# Altium PCB PCB.PcbDoc
Units mil, origin at the board's own origin, x right, y up, seen from the top; angles counter-clockwise.
Board outline 3776.62 x 3776.62 mil, 2 copper layers (Top Layer, Bottom Layer); 52 components, 61 nets, 206 pads, 78 vias.
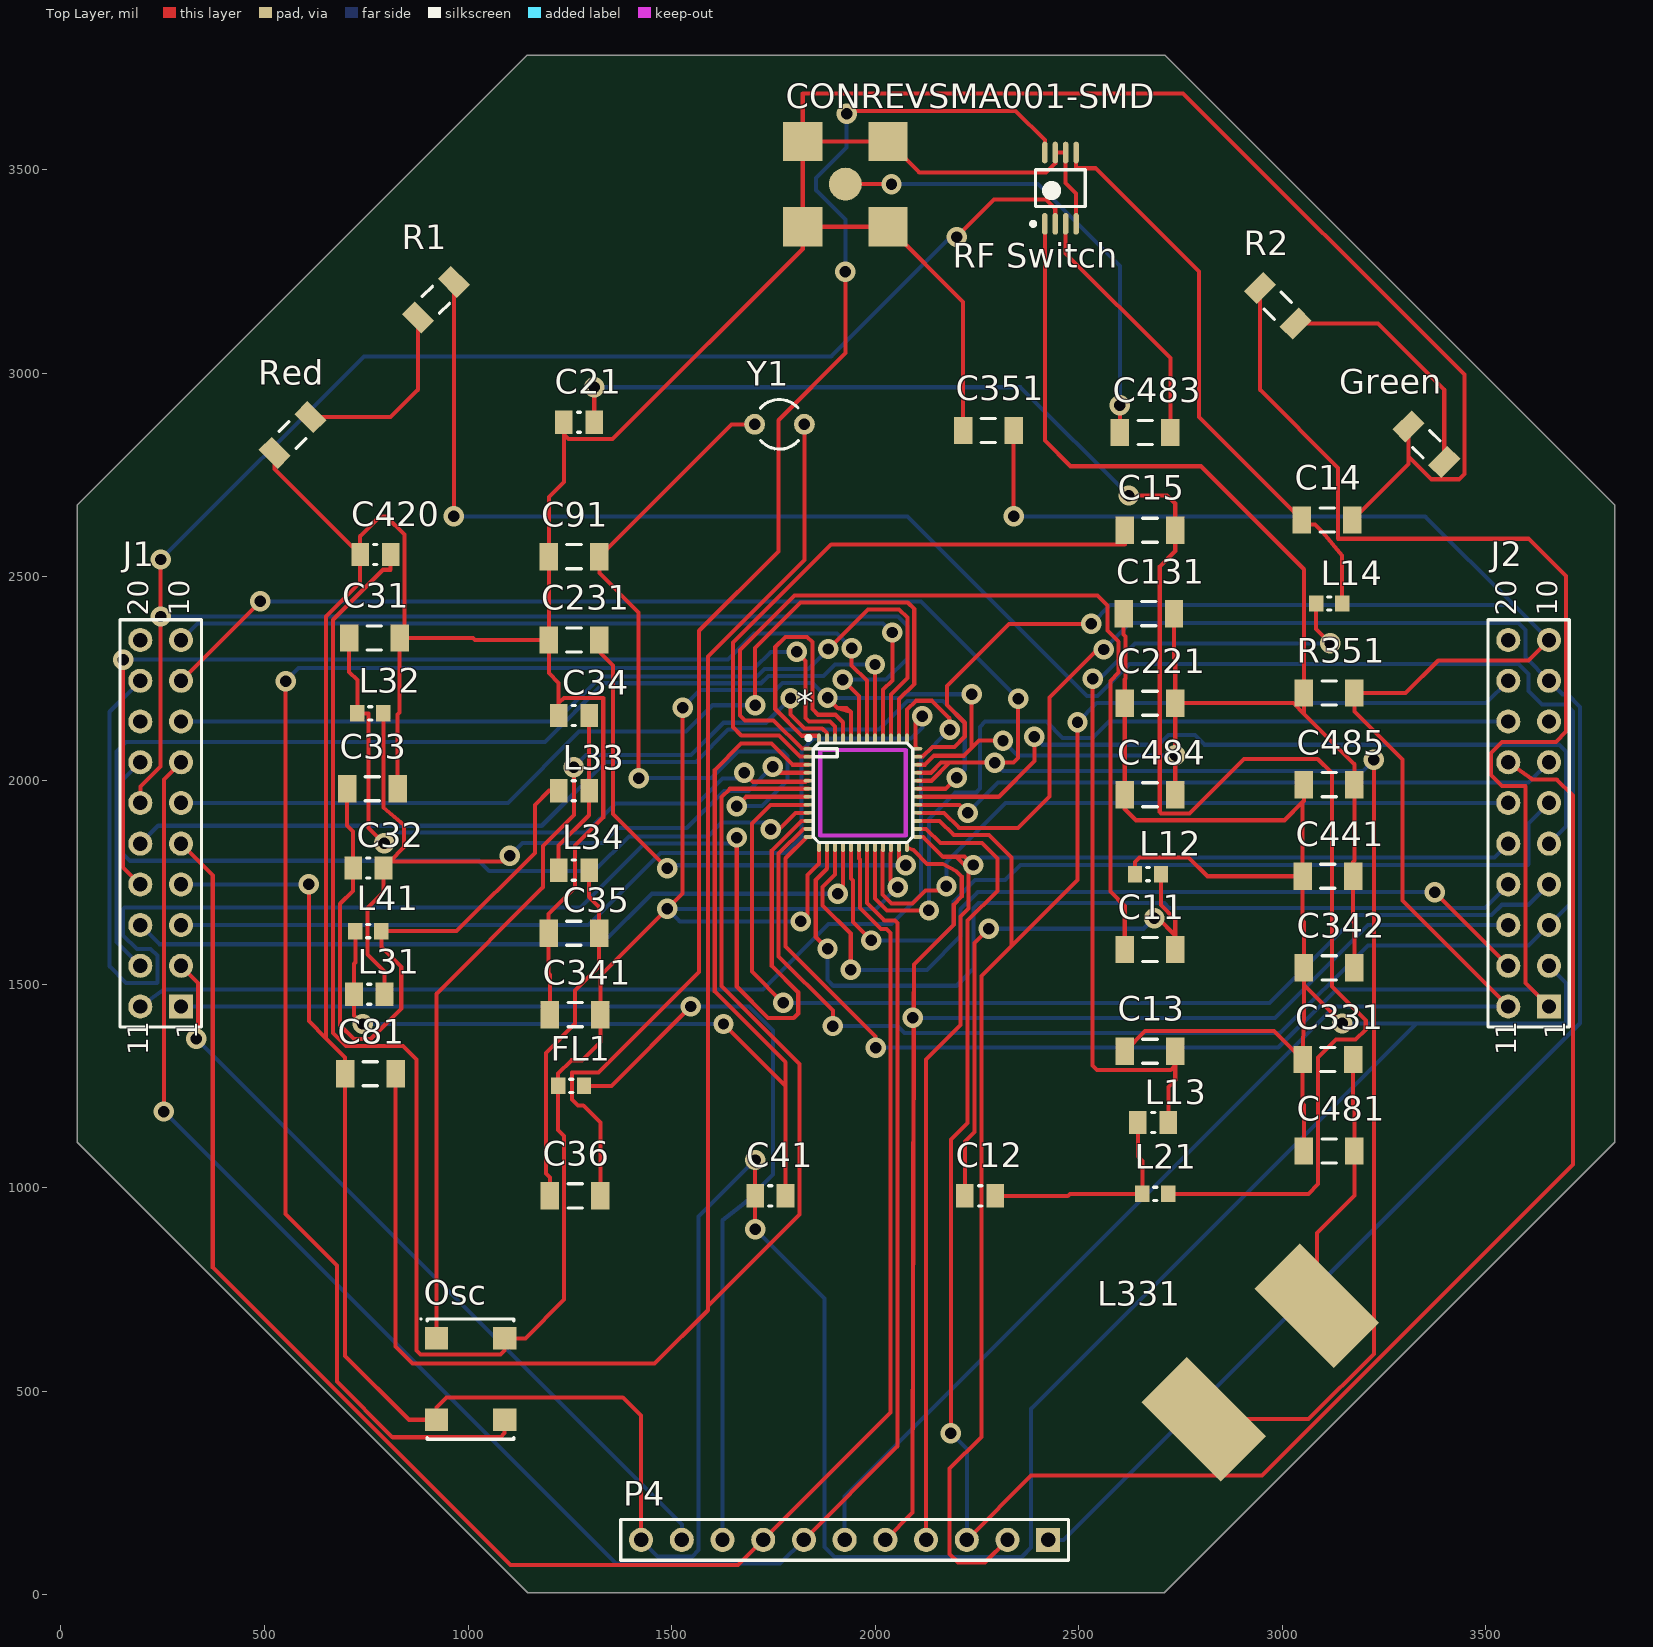
[diagram p0: Top Layer view]
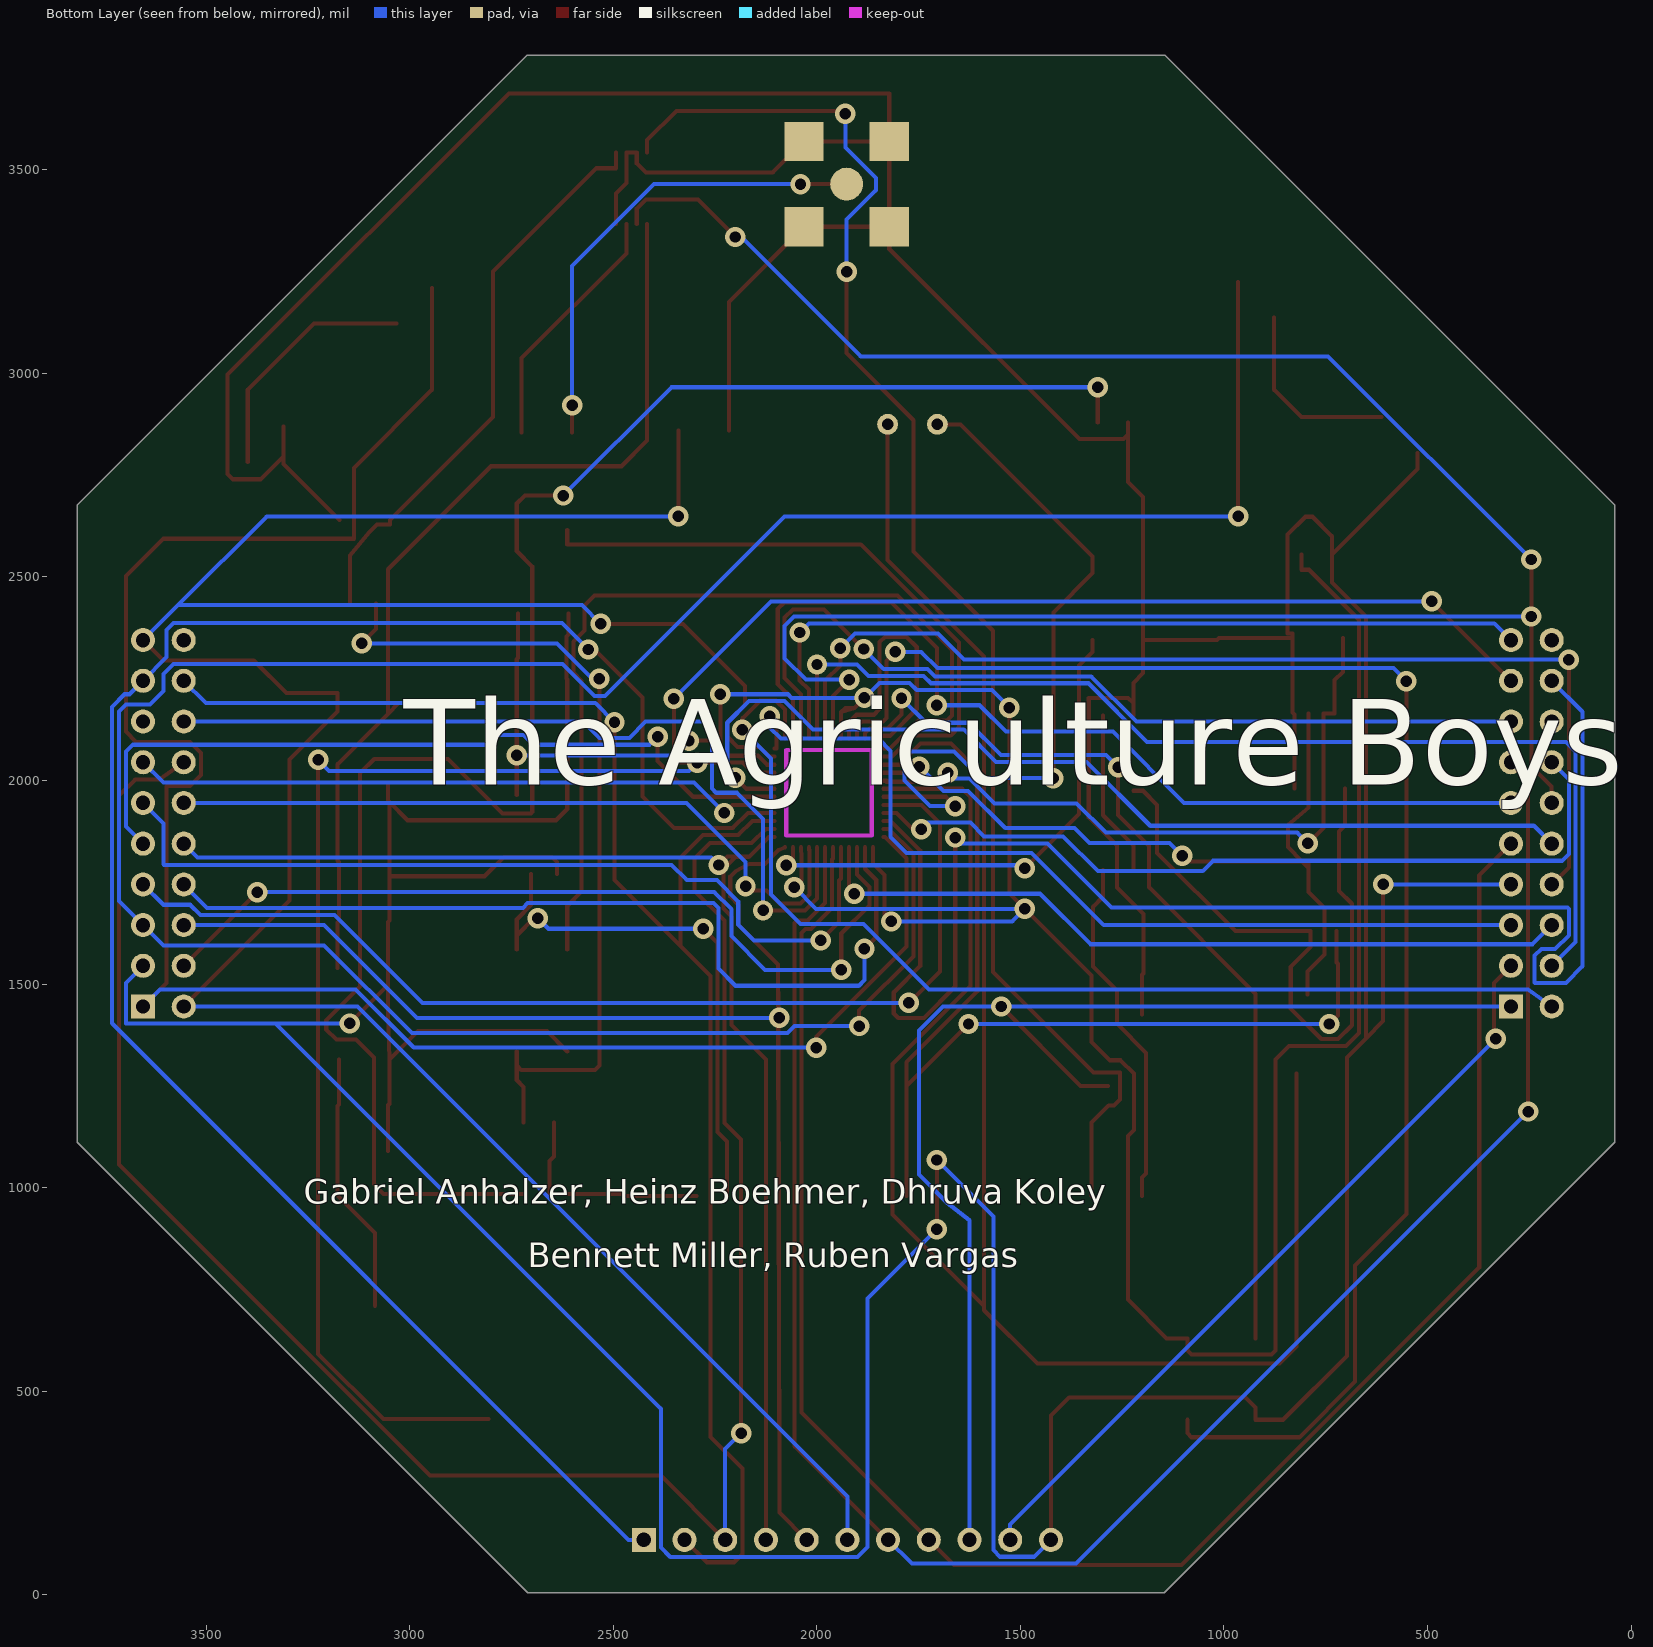
[diagram p1: Bottom Layer view, seen from below]

## Layer stack, top to bottom
Top Solder: solder mask 0.4, Solder Resist, Dk 3.5
Top Layer: signal copper 1.4
Dielectric 1: dielectric 12.6, FR-4, Dk 4.8
Bottom Layer: signal copper 1.4
Bottom Solder: solder mask 0.4, Solder Resist, Dk 3.5

## Board outline
40,1111.62 40,2676.62 1145,3781.62 2711.62,3781.62 3816.62,2676.62 3816.62,1111.62 2710,5 1146.62,5

## Design rules (kind name [scope] priority, off if disabled: settings)
Clearance [All] p1: gap=7 ignorepadtopadclearanceinfootprint=TRUE
PolygonConnect [All] p1: connectstyle=Relief reliefconductorwidth=10 reliefentries=4 polygonreliefangle="90 Angle" airgapwidth=10
RoutingVias [All] p1: holewidth=28 width=50 viastyle="Through Hole" minholewidth=28 minwidth=50 maxholewidth=28 maxwidth=50
SolderMaskExpansion [All] p1: expansion=4
Width [All] p1: maxlimit=10 minlimit=10 preferedwidth=10
30 further rules are at their usual default settings.

## Classes and differential pairs
component class Sheet2: Green J1 J2 P4 R1 R2 Red
component class Sheet1: * C11 C12 C13 C14 C15 C21 C31 C32 C33 C34 C35 C36 C41 C81 C91 C131 C221 C231 C331 C341 C342 C351 C420 C441 C481 C483 C484 C485 CONREVSMA001-SMD FL1 L12 L13 L14 L21 L31 L32 L33 L34 L41 L331 Osc R351 "RF Switch" Y1

## Components (designator, comment, footprint, x,y, rotation, side; value= is the part's Value field where it differs from the comment)
* "CC1352R1F3RGZ_1" CC1352R 1970,1970 r0 top
C11 "Cap" "1206 Real" 2675,1585 r0 top value=12pF
C12 "Cap" "0805 Real" 2257.6,980 r0 top value=1.1pF
C13 "Cap" "1206 Real" 2675,1335 r0 top value=1pF
C14 "Cap" "1206 Real" 3110,2640 r180 top value=1pF
C15 "Cap" "1206 Real" 2675,2615 r0 top value=12pF
C21 "Cap" "0805 Real" 1272.6,2880 r0 top value=1.1pF
C31 "Cap" "1206 Real" 770,2350 r0 top value=100pF
C32 "Cap" "0805 Real" 755,1785 r180 top value=3.6pF
C33 "Cap" "1206 Real" 765,1980 r180 top value=2.7pF
C34 "Cap" "0805 Real" 1260,2160 r0 top value=6.2pF
C35 "Cap" "1206 Real" 1260,1625 r0 top value=3pF
C36 "Cap" "1206 Real" 1262.99,980 r0 top value=100pF
C41 "Cap" "0805 Real" 1742.4,980 r0 top value=3.6pF
C81 "Cap" "1206 Real" 760,1280 r180 top value=12pF
C91 "Cap" "1206 Real" 1260.35,2550 r180 top value=12pF
C131 "Cap" "1206 Real" 2672.01,2410 r180 top value=0.1uF
C221 "Cap" "1206 Real" 2675,2190 r180 top value=0.1uF
C231 "Cap" "1206 Real" 1260.35,2345 r180 top value=1uF
C331 "Cap" "1206 Real" 3112.01,1315 r180 top value=22uF
C341 "Cap" "1206 Real" 1262.99,1425 r180 top value=22uF
C342 "Cap" "1206 Real" 3115,1540 r180 top value=0.1uF
C351 "Cap" "1206 Real" 2277.99,2860 r180 top value=0.1uF
C420 "Cap" "0805 Real" 772.4,2555 r180 top value=0.01uF
C441 "Cap" "1206 Real" 3112.01,1765 r180 top value=0.1uF
C481 "Cap" "1206 Real" 3115,1090 r180 top value=0.1uF
C483 "Cap" "1206 Real" 2662.99,2855 r180 top value=12pF
C484 "Cap" "1206 Real" 2675,1965 r180 top value=12pF
C485 "Cap" "1206 Real" 3115,1990 r180 top value=12pF
CONREVSMA001-SMD "" SMA_Jack 1926.81,3465 r90 top
FL1 "BLM" 0603 1253.11,1250 r180 top value=2.4nH
Green "LED0" "1206 Real" 3353.85,2826.15 r135 top
J1 "SSQ-110-23-L-D" HDR2X10_CEN 295,1445 r90 top
J2 "SSQ-110-23-L-D" HDR2X10_CEN 3655,1445 r90 top
L12 "Inductor" 0603 2670,1770 r180 top value=2.4nH
L13 "Inductor" "0805 Real" 2682.6,1160 r0 top value=1.5nH
L14 "Inductor" 0603 3115,2435 r0 top value=2nH
L21 "Inductor" 0603 2688.11,985 r180 top value=2.4nH
L31 "Inductor" "0805 Real" 757.32,1475 r180 top value=27nH
L32 "Inductor" 0603 760,2165 r180 top value=7.5nH
L33 "Inductor" "0805 Real" 1260,1975 r0 top value=6.8nH
L34 "Inductor" "0805 Real" 1260,1780 r0 top value=6.8nH
L41 "Inductor" 0603 755,1630 r0 top value=7.5nH
L331 "Inductor" "Non-Standard Inductor" 2945.81,570.81 r45 top value=6.8mH
Osc "Osc" OSC 1006.14,530 r0 top
P4 "BB02-HJ221-KB1-603000" HDR1X11 2425,135 r180 top
R1 "Res1" "1206 Real" 921.15,3181.15 r45 top value=180
R2 "Res3" "1206 Real" 2988.85,3166.15 r135 top value=220
R351 "Res3" "1206 Real" 3115,2215 r180 top value=100K
Red "LED0" "1206 Real" 568.85,2848.85 r225 top
"RF Switch" "PE4250" "RF Switch" 2455,3455 r90 top
Y1 "32.768kHz" R38 1765,2875 r270 top

## Footprints (in the part's own frame and the unit in brackets; to place one, negate y for a bottom-side part, rotate by r counter-clockwise, add the part's x,y. Pads: shape width x height; smd on the part's side, far side on the other; paste and mask are expansions set on the pad)
0603 [mm]
  rect 0.89x1.02 smd: 1(-0.81,0) 2(0.81,0)
  silkscreen extent -0.1,-0.41 0.1,0.41, body extent -0.9,-0.5 0.9,0.5, height 0.4
"0805 Real" [mm]
  rect 1.1x1.45 smd: 1(-0.95,0) 2(0.95,0)
  silkscreen extent -0.1,-0.62 0.1,0.62, body extent -1.15,-0.72 1.15,0.72, height 1.15
"1206 Real" [mm] "Chip Capacitor, 2-Leads, Body 3.05x1.55mm, IPC Medium Density"
  rect 1.15x1.7 smd: 1(-1.575,0) 2(1.575,0)
  silkscreen extent -0.45,-0.75 0.45,0.75, body extent -1.6,-0.85 1.6,0.85, height 0.65
CC1352R [mm] "CQFP, 48-Leads, Body 7,40x7,40mm, Pitch 0,50mm, IPC Medium Density"
  oval 0.6x0.24 smd: 1(-3.4,2.75) 2(-3.4,2.25) 3(-3.4,1.75) 4(-3.4,1.25) 5(-3.4,0.75) 6(-3.4,0.25) 7(-3.4,-0.25) 8(-3.4,-0.75) 9(-3.4,-1.25) 10(-3.4,-1.75) 11(-3.4,-2.25) 12(-3.4,-2.75) 25(3.4,-2.75) 26(3.4,-2.25) 27(3.4,-1.75) 28(3.4,-1.25) 29(3.4,-0.75) 30(3.4,-0.25) 31(3.4,0.25) 32(3.4,0.75) 33(3.4,1.25) 34(3.4,1.75) 35(3.4,2.25) 36(3.4,2.75)
  oval 0.24x0.6 smd: 13(-2.75,-3.4) 14(-2.25,-3.4) 15(-1.75,-3.4) 16(-1.25,-3.4) 17(-0.75,-3.4) 18(-0.25,-3.4) 19(0.25,-3.4) 20(0.75,-3.4) 21(1.25,-3.4) 22(1.75,-3.4) 23(2.25,-3.4) 24(2.75,-3.4) 37(2.75,3.4) 38(2.25,3.4) 39(1.75,3.4) 40(1.25,3.4) 41(0.75,3.4) 42(0.25,3.4) 43(-0.25,3.4) 44(-0.75,3.4) 45(-1.25,3.4) 46(-1.75,3.4) 47(-2.25,3.4) 48(-2.75,3.4)
  silkscreen extent -3.52,-3.1 3.1,3.54, body extent -3.5,-3.5 6.98,3.5, height 1
HDR1X11 [mm] "Connector; Header; 11 Position"
  rect 1.5x1.5 hole 0.9: 1(0,0)
  round 1.5 hole 0.9: 2(2.54,0) 3(5.08,0) 4(7.62,0) 5(10.16,0) 6(12.7,0) 7(15.24,0) 8(17.78,0) 9(20.32,0) 10(22.86,0) 11(25.4,0)
  silkscreen extent -1.27,-1.27 26.67,1.27
HDR2X10_CEN [mm] "Connector; Header; 10x2 Position"
  rect 1.5x1.5 hole 0.9: 1(0,0)
  round 1.5 hole 0.9: 2(2.54,0) 3(5.08,0) 4(7.62,0) 5(10.16,0) 6(12.7,0) 7(15.24,0) 8(17.78,0) 9(20.32,0) 10(22.86,0) 11(0,2.54) 12(2.54,2.54) 13(5.08,2.54) 14(7.62,2.54) 15(10.16,2.54) 16(12.7,2.54) 17(15.24,2.54) 18(17.78,2.54) 19(20.32,2.54) 20(22.86,2.54)
  silkscreen extent -1.27,-1.27 24.13,3.81
"Non-Standard Inductor" [mm] "Chip Inductor, Body 1.0x0.5mm, IPC High Density"
  rect 4x7 smd: 1(-5,0) 2(5,0)
OSC [mm] "SON, 4-Leads, Body 7,00x5,08mm, Pitch 5,08mm, IPC Medium Density"
  rect 1.45x1.4 smd: 1O(-2.13,2.54) 2O(-2.13,-2.54) 3O(2.13,-2.54) 4O(2.13,2.54)
  silkscreen extent -3.15,-3.75 2.7,3.8, body extent -2.54,-2.54 2.54,2.54, height 1.27
R38 [mm] "Crystal, Thru-Hole; 2 Leads; Body 3.1 x 8.2 mm (Dia.xH)"
  round 1.3 hole 0.7: 1(0,1.55) 2(0,-1.55)
  silkscreen extent -1.55,-1.19 1.55,1.17
"RF Switch" [mm] "TSOP, 8-Leads, Body 3.00x3.00mm, Pitch 0.65mm, IPC Medium Density"
  oval 1.35x0.35 smd: 1P(-2.225,0.975) 2P(-2.225,0.325) 3P(-2.225,-0.325) 4P(-2.225,-0.975) 5P(2.225,-0.975) 6P(2.225,-0.325) 7P(2.225,0.325) 8P(2.225,0.975)
  silkscreen extent -2.35,-1.55 1.15,1.82, body extent -1.55,-1.55 1.55,1.55, height 0.92
SMA_Jack [mm] "Connector; RF Coaxial, MMCX, Thru-Hole; 5 Position; Vertical"
  round 2.05 all layers, no hole: 1(0,0)
  rect 2.44x2.44 all layers, no hole: 2(-2.66,2.66) 3(-2.66,-2.66) 4(2.66,2.66) 5(2.66,-2.66)

## Part data
C11 C12 C13 C14 C15 C21 C31 C32 C33 C34 C35 C36 C41 C81 C91 C131 C221 C231 C331 C341 C342 C351 C420 C441 C481 C483 C484 C485: "Capacitor", LatestRevisionDate=17-Jul-2002, LatestRevisionNote="Re-released for DXP Platform.", PackageDescription="Radial Cap, Thru-Hole; 2 Leads; 0.3 in Pin Spacing", PackageReference=RAD-0.3, Published=8-Jun-2000, Publisher="Altium Limited"
CONREVSMA001-SMD: library part COAX-M, "RF Coaxial PCB Connector, MMCX; Thru-Hole, Vertical Mount Plug,  50 Ohm Impedance", PackageDocument="Rev. A, 16-Jun-1997", ComponentLink1Description="Manufacturer Link", ComponentLink1URL=http://www.amphenolrf.com/, DatasheetDocument=30-May-2003, DrillSize="Corresponds to nominal value.", LatestRevisionDate=15-Jul-2004, LatestRevisionNote="Component Replaced.", PackageReference=908-21103, PCB_Layout="Complies with manufacturer's recommendation.", Published=15-Jul-2004, Publisher="Altium Limited"
FL1: library part Inductor, "Inductor", Code_IEC=1005, Code_JEITA=0402, LatestRevisionDate=29-May-2009, LatestRevisionNote="IPC-7351 Footprint Added.", PackageDescription="Chip Inductor", PackageReference=0402-A, Published=8-Jun-2000, Publisher="Altium Limited"
Green Red: "Typical INFRARED GaAs LED", LatestRevisionDate=08-Jul-2005, LatestRevisionNote="Mech Layer 1 removed.", PackageDescription="LED; 2 Leads", PackageReference=LED-0, Published=8-Jun-2000, Publisher="Altium Limited"
P4: library part "Header 11", "Header, 11-Pin", LatestRevisionDate=17-Jul-2002, LatestRevisionNote="Re-released for DXP Platform.", Publisher="Altium Limited"
R1: library part Res3, "Resistor", LatestRevisionDate=29-May-2009, LatestRevisionNote="IPC-7351 Footprint Added.", PackageDescription="Chip Resistor", PackageReference=J1-0603, Published=8-Jun-2000, Publisher="Altium Limited"
R2 R351: "Resistor", LatestRevisionDate=29-May-2009, LatestRevisionNote="IPC-7351 Footprint Added.", PackageDescription="Chip Resistor", PackageReference=J1-0603, Published=8-Jun-2000, Publisher="Altium Limited"
Y1: library part XTAL, "Crystal Oscillator", LatestRevisionDate=17-Jul-2002, LatestRevisionNote="Re-released for DXP Platform.", PackageDescription="Crystal, Thru-Hole; 2 Leads; Body 3.1 x 8.2 mm (Dia.xH)", PackageReference=R38, Published=8-Jun-2000, Publisher="Altium Limited"
L12 L13 L14 L21 L31 L32 L33 L34 L41 L331: Code_IEC=1005, Code_JEITA=0402, LatestRevisionDate=29-May-2009, LatestRevisionNote="IPC-7351 Footprint Added.", PackageDescription="Chip Inductor", PackageReference=0402-A, Published=8-Jun-2000, Publisher="Altium Limited"

## Via types
v1: diameter 50, hole 28, Top Layer to Bottom Layer, 78 vias

## Nets (pads, with @x,y where several pads share a name; then routed paths per layer and width w, separated by ;. In a path a pad name is that pad's centre, name@x,y a point inside that pad or via, vN(x,y) a via of type N, cw(c..) or ccw(c..) an arc to the next point about the centre after c; other vN are vias at no path point)
5V0_BP: J1.2 P4.10 | length 1923.6
  Top Layer w10: J1.2 337,1503 337,1371 v1(332,1366)
  Bottom Layer w10: v1(332,1366) 1525,173 P4.10
DCDC_SW: *.33 L331.1 | length 3094.7
  Top Layer w10: *.33 2137.21,2019.21 2162,2044 v1(2294,2044) ; L331.1 3064.57,431.61 3225,592.04 v1(3225,2051)
  Bottom Layer w10: v1(2294,2044) 2314,2024 3198,2024 v1(3225,2051)
DIO3: *.8 J2.4 | length 2632.1
  Top Layer w10: v1(1774,1454) 1697,1531 1697,1894.52 1742.95,1940.47 *.8
  Bottom Layer w10: v1(1774,1454) 2969,1454 3185,1670 3514,1670 3539,1695 3605,1695 J2.4
DIO4_SCL: *.9 J1.17 | length 2016.2
  Top Layer w10: v1(1743.9,1880) 1763.9,1880 1804.69,1920.79 *.9
  Bottom Layer w10: J1.17 153,2003 153,1820 170,1803 1027,1803 1052,1778 1309.76,1778 1394.85,1863.08 1589.08,1863.08 1623,1897 1726.9,1897 v1(1743.9,1880)
DIO5_SDA: *.10 J1.19 | length 3783.9
  Top Layer w10: v1(1660,1860) 1660,1494 1737,1417 1800,1417 1811,1428 1811,1480 1746,1545 1746,1828.04 1819.06,1901.1 *.10
  Bottom Layer w10: J1.19 119,2169 119,1544 160,1503 236,1503 237,1504 237,1570 220.47,1586.53 186.47,1586.53 153,1620 153,1685 156,1688 1275.82,1688 1433,1845.18 1645.18,1845.18 v1(1660,1860)
DIO6_RLED: *.11 J2.3 R1.2 | length 6615.5
  Top Layer w10: v1(965,2649) R1.2 ; *.11 1823.42,1881.42 1763,1821 1763,1567.76 1896,1434.76 v1(1896,1397)
  Bottom Layer w10: v1(965,2649) 2079,2649 2520,2208 2546,2208 2624.53,2286.53 3580,2286.53 3605,2261.53 3605,2220 3638,2187 3697,2187 3714,2170 3714,1704 J2.3 3605,1595 3210,1595 2994.73,1379.73 2072.27,1379.73 2055,1397 v1(1896,1397)
DIO7_GLED: *.12 J2.1 R2.2 | length 4961.1
  Top Layer w10: *.12 1832.52,1861.73 1780,1809.21 1780,1592.15 2001,1371.15 v1(2001,1344) ; R2.2 2945,2960 3137,2768 3137,2594 3605,2594 3697,2502 3697,2120 3672,2095 3540,2095 3513,2068 3513,2014 3540,1987 3596,1987 3597,1986 3597,1503 J2.1
  Bottom Layer w10: v1(2001,1344) 2990,1344 3133,1487 3613,1487 J2.1
DIO8_MISO: *.14 J2.14 | length 2227.7
  Top Layer w10: *.14 1881.42,1783.42 1854,1756 1854,1616 v1(1883,1587)
  Bottom Layer w10: v1(1883,1587) 1883,1510 1896.95,1496.05 2200,1496.05 2241.95,1538 2241.95,1687.33 2253.86,1699.24 2710.1,1699.24 2722,1687.33 3497.33,1687.33 J2.14
DIO9_MOSI: *.15 J2.12 | length 2150
  Top Layer w10: *.15 1901.1,1769.1 1871,1739 1871,1693 1940,1624 v1(1940,1535) ; v1(3374,1726) J2.12
  Bottom Layer w10: v1(1940,1535) 2127.16,1535 2210,1617.84 2210,1684 2252,1726 v1(3374,1726)
DIO10_SCLK: *.16 J1.13 | length 1903.3
  Top Layer w10: v1(1908,1722) 1920.79,1734.79 *.16
  Bottom Layer w10: J1.13 242,1598 1328,1598 1452,1722 v1(1908,1722)
DIO11_CS: *.17 J2.6 | length 2146.2
  Top Layer w10: *.17 1940.47,1759 1945,1754.47 1945,1652.78 v1(1990.46,1607.32)
  Bottom Layer w10: v1(1990.46,1607.32) 2154.32,1607.32 2193,1646 2193,1703.41 2245.17,1755.58 2319.42,1755.58 2356.83,1793 3603,1793 3605,1795 3605,1895 J2.6
DIO14_BTN2: *.20 J2.18 | length 2139.7
  Top Layer w10: *.20 1999.53,1710.22 2028.75,1681 v1(2132,1681)
  Bottom Layer w10: v1(2132,1681) 2132,1906 2196,1970 2247,1970 2257,1980 2257,2132 2270,2145 2420.3,2145 2460.29,2105.01 2534,2105.01 2573.99,2145 J2.18
DIO15_BTN1: *.21 J2.16 | length 1800.9
  Top Layer w10: *.21 2019.21,1829 2018,1829 2018,1720 2040,1698 2092,1698 2124,1730 2165,1730 v1(2175,1740)
  Bottom Layer w10: v1(2175,1740) 2175,1800 2320,1945 J2.16
DIO16_TDO: *.26 J2.17 P4.3 | length 4929.1
  Top Layer w10: *.26 2125.05,1881.42 2160,1846.47 2262.53,1846.47 2300,1809 2300,1728.95 2227,1655.95 2227,1159 2186,1118 v1(2186,397) ; P4.3 2383,293 2950,293 3713.53,1056.53 3713.53,1963.47 3674,2003 3613.53,2003 J2.17
  Bottom Layer w10: v1(2186,397) 2225,358 P4.3
DIO17_TDI: *.27 J2.19 P4.2 | length 3932.1
  Top Layer w10: *.27 2158.37,1901.1 2193,1866.47 2280,1866.47 2335,1811.47 2335,1593.97 ; P4.2 2270,80 2203,80 2183,100 2183,310 2261,388 2261,1519.97 2335,1593.97 ; v1(2497,2143) 2497,1755.97 2335,1593.97
  Bottom Layer w10: v1(2497,2143) 2544.17,2190.17 3500.17,2190.17 J2.19
DIO19_CTS: *.29 J2.7 | length 1611
  Top Layer w10: *.29 2207,1940.47 v1(2227,1920.47)
  Bottom Layer w10: v1(2227,1920.47) 2301.53,1995 3605,1995 J2.7
DIO20_Flash_CS: *.30 J2.5 | length 1967.9
  Top Layer w10: *.30 2303.48,1960.16 2391,2047.68 v1(2391,2108)
  Bottom Layer w10: v1(2391,2108) 2411,2088 2697.42,2088 2720.94,2111.52 2785.56,2111.52 2809.08,2088 3680,2088 3697,2071 3697,1887 J2.5
DIO21: *.31 J1.15 | length 2442.6
  Top Layer w10: *.31 2172.84,1979.84 v1(2200,2007)
  Bottom Layer w10: J1.15 239,1889 1181,1889 1337.59,2045.59 1559.62,2045.59 1639.03,2125 2009,2125 2079,2195 2167,2195 2220,2142 2220,2027 v1(2200,2007)
DIO22: *.32 J1.9 | length 2651.9
  Top Layer w10: J1.9 v1(490,2440) ; *.32 2138.53,1999.53 2183,2044 2340,2044 2351,2055 v1(2351,2201)
  Bottom Layer w10: v1(490,2440) 2112,2440 v1(2351,2201)
DIO23_Analog: *.36 J1.3 | length 2264.8
  Top Layer w10: *.36 2099,2078.27 2099,2141 v1(2116,2158)
  Bottom Layer w10: J1.3 1295.28,1645 1472.87,1822.59 1779.63,1822.59 1819,1861.95 1819,2072.94 1849.04,2102.98 2088.47,2102.98 2116,2130.51 v1(2116,2158)
DIO24_Analog: *.37 J1.11 | length 2691.4
  Top Layer w10: *.37 2078.27,2174.27 2100,2196 2140,2196 2183,2153 v1(2183,2125)
  Bottom Layer w10: J1.11 253.53,1487 1724,1487 1885,1648 2040,1648 2112,1720 2112,2054 v1(2183,2125)
DIO25_Analog: *.38 J1.6 | length 2427.2
  Top Layer w10: v1(1705,2185) 1705,2325.56 1817,2437.56 2080,2437.56 2096,2421.56 2096,2237.42 2058.58,2200 *.38
  Bottom Layer w10: J1.6 1098,1945 1273,2120 1535,2120 1600,2185 v1(1705,2185)
DIO26_Analog: *.39 J1.8 | length 2219.4
  Top Layer w10: v1(1885,2323.07) 1982.5,2420.56 2058.44,2420.56 2079,2400 2079,2251.5 2038.9,2211.4 *.39
  Bottom Layer w10: J1.8 1215,2145 1326,2256 1710,2256 1727.71,2273.71 1835.64,2273.71 v1(1885,2323.07)
DIO27_Analog: *.40 J1.10 | length 2042.4
  Top Layer w10: *.40 2019.21,2223.21 2042,2246 v1(2042,2363.56)
  Bottom Layer w10: J1.10 336,2386 2019.56,2386 v1(2042,2363.56)
DIO28_Analog: *.41 J1.12 | length 2683.8
  Top Layer w10: *.41 v1(1999.53,2285)
  Bottom Layer w10: J1.12 136,1604 136,2071 160,2095 1189.18,2095 1333.18,2239 1719.83,2239 1737.54,2256.71 1872.71,2256.71 1901,2285 v1(1999.53,2285)
DIO29_Analog: *.42 J1.14 | length 2636.6
  Top Layer w10: v1(153,2297) 153,1787 J1.14 ; v1(1942,2325) 1942,2283.1 1979.84,2245.26 *.42
  Bottom Layer w10: v1(153,2297) 1638,2297 1702,2361 1906,2361 v1(1942,2325)
GND: "RF Switch.4P" "RF Switch.6P" "RF Switch.7P" C13.1 C14.1 C21.1 C31.2 C33.1 C34.1 C35.1 C41.1 C81.2 C91.2 C131.2 C221.2 C231.2 C331.2 C341.2 C342.2 C351.2 C420.2 C441.2 C481.2 C484.2 C485.2 CONREVSMA001-SMD.2 CONREVSMA001-SMD.3 CONREVSMA001-SMD.4 CONREVSMA001-SMD.5 Green.2 J1.4 J2.2 L12.2 Osc.2O P4.11 Red.2 | length 20635.4
  Top Layer w10: Red.2 525,2765 C420.2 ; v1(609,1745) 609,1408.99 651,1366.99 ; C33.1 827.01,2162 832.01,2167 C31.2 ; C341.2 1200.98,1523 1197.99,1525.99 C35.1 1197.99,1672 1263,1737.01 1263,1840 1332,1909 1332,2203 1235.6,2203 1222.6,2190 ; C34.1 1222.6,2190 ; C21.1 1235.2,2850 ; P4.11 1425,440 1380,485 947.28,485 922.28,460 Osc.2O 854.93,430 697.99,586.93 C81.2 697.99,1320 651,1366.99 ; v1(1705,898) C41.1 v1(1705,1068) ; C351.2 2215.98,3175.83 CONREVSMA001-SMD.3 CONREVSMA001-SMD.2 ; 2493.39,3367.4 2493.39,3442 2467.8,3467.59 2467.8,3542.6 2442.2,3542.6 2442.2,3515.2 2420,3493 2108.26,3493 CONREVSMA001-SMD.5 CONREVSMA001-SMD.4 ; C131.2 2610,2359 2615,2354 2615,2250.01 2612.99,2248 C221.2 C484.2 2612.99,1930 2640.46,1902.53 3005.53,1902.53 3050,1947.01 ; C13.1 2662.99,1385 2980,1385 C331.2 ; L12.2 2638.11,1800 2649.11,1811 2770,1811 2816,1765 C441.2 ; C481.2 3052.99,1203 3050,1205.99 C331.2 ; C485.2 3052.99,1950 3050,1947.01 ; v1(3147.54,1403.47) 3052.99,1498.02 ; C14.1 3310,2777.99 3310,2796 ; Green.2 3310,2796 ; 651,1366.99 651,2403 735,2487 C420.2 ; C420.2 735,2600 783,2648 800,2648 844,2604 844,2361 832.01,2361 C31.2 ; C31.2 1012,2350 1017,2345 C231.2 ; C231.2 1198.35,2264.25 1222.6,2240 1222.6,2190 ; C231.2 C91.2 1198.35,2696 1235.2,2732.85 1235.2,2850 ; 1235.2,2850 1246.2,2839 1355,2839 1822.09,3306.09 CONREVSMA001-SMD.2 ; CONREVSMA001-SMD.2 CONREVSMA001-SMD.4 ; CONREVSMA001-SMD.4 1822.09,3688 2756,3688 3447,2997 3447,2753 3434,2740 3366,2740 3310,2796 ; C331.2 3052.99,1429.99 3052.99,1498.02 ; C441.2 3050,1947.01 ; C441.2 3050,1655.99 3052.99,1653 C342.2 3052.99,1498.02
  Bottom Layer w10: J1.4 v1(609,1745) ; P4.11 1466.53,93.47 1550,93.47 1566.53,110 1566.53,929.53 v1(1705,1068) ; v1(1705,898) 1875,728 1875,118 1900,93 2360,93 2383,116 2383,457 3329.47,1403.47 ; v1(3147.54,1403.47) 3329.47,1403.47 ; J2.2 3697,1503 3697,1403.47 3329.47,1403.47
Net*_1: *.1 C11.1 | length 2210.2
  Top Layer w10: *.1 1820,2078.27 1750.27,2148 1680,2148 1668,2160 1668,2320.76 1801.8,2454.56 2546.3,2454.56 2570.84,2430.03 2570.84,2368.16 2598,2341 2598,2265 2578,2245 2578,1727 2612.99,1692.01 C11.1
Net*_2: *.2 C15.1 | length 1520
  Top Layer w10: *.2 1815.64,2058.58 1763.23,2111 1671,2111 1651,2131 1651,2339 1892,2580 2612.99,2580 C15.1
Net*_3: *.3 C41.2 L31.2 L41.1 | length 2736.8
  Top Layer w10: L41.1 723.11,1553.19 719.92,1550 L31.2 719.92,1423.08 v1(741,1402) ; v1(1627.54,1402) 1779.8,1249.73 ; C41.2 1779.8,1249.73 ; *.3 1797.1,2038.9 1745,2091 1670.66,2091 1606,2026.34 1606,1482 1779.8,1308.2 1779.8,1249.73
  Bottom Layer w10: v1(741,1402) v1(1627.54,1402)
Net*_4: *.4 C32.1 L31.1 L32.1 | length 1948.5
  Top Layer w10: L32.1 791.89,1934 843,1891 843,1836.6 C32.1@808.03,1801.63 ; L31.1 794.72,1531 753,1572.72 753,1687 792.4,1726.4 C32.1 ; v1(1102,1815) 1088.63,1801.63 C32.1@808.03,1801.63 ; v1(1748,2034) 1743.17,2034 1739.17,2030 1749.96,2019.21 *.4 ; C32.1 C32.1@808.03,1801.63 ; C32.1 792.4,1801.63 C32.1@808.03,1801.63
  Bottom Layer w10: v1(1102,1815) 1134,1847 1330.41,1847 1366.58,1883.17 1537.17,1883.17 1628.39,1974.39 1688.39,1974.39 v1(1748,2034)
Net*_6: *.6 C81.1 Y1.1 | length 5427.8
  Top Layer w10: C81.1 822.01,609.44 863.45,568 1458,568 1589,699 1589,709 ; Y1.1 1826.02,2542.22 1589,2305.2 1589,709 ; *.6 1642.84,1979.84 1623,1960 1623,1495 1814,1304 1814,934 1589,709
Net*_7: *.7 C91.1 Y1.2 | length 1894.6
  Top Layer w10: v1(1419,2006) 1419,2413 1322.36,2509.64 C91.1 1647.36,2875 Y1.2 ; v1(1660,1937) 1683.16,1960.16 *.7
  Bottom Layer w10: v1(1419,2006) 1598.29,2006 1663.29,2071 1774,2071 1785,2060 1785,2000 1722,1937 v1(1660,1937)
Net*_13: "RF Switch.1P" *.13 *.22 *.34 *.44 C131.1 C221.1 C341.1 C342.1 C420.1 C441.1 C484.1 C485.1 FL1.2 Osc.4O R351.2 | length 10303.9
  Top Layer w10: C420.1 809.8,2517.8 790.8,2517.8 668,2395 668,1380 700,1348 840,1348 873,1315 873,600 883,590 1080,590 1090,600 Osc.4O 1141,630 1236,725 1236,1127.22 1221.22,1142 FL1.2 1221.22,1280 1254.22,1313 1280,1313 1325,1358 C341.1 1325,1521 v1(1489,1685) 1527,1723 v1(1527,2179) ; v1(1817,1654) 1834,1671 1834,1768 1861.73,1795.73 *.13 ; v1(1883,2203) 1907.33,2178.67 ; *.44 1940.47,2168.2 ; *.22 2038,1811.1 2038,1755 v1(2055,1738) ; *.34 2122.07,2038.9 2144.17,2061 2218,2061 2237,2080 ; v1(2237,2212) 2237,2080 ; v1(2314,2098) 2255,2098 2237,2080 ; 2416.61,3367.4 2416.61,2835.39 2480,2772 2800,2772 3052.99,2519.01 R351.2 3052.99,2164.02 ; C131.1 2734.02,2300.99 2737.01,2298 C221.1 ; C484.1 v1(2737.01,2062.01) C221.1 ; C342.1 3177.01,1651 3174.02,1653.99 C441.1 3174.02,1800.06 3177.01,1803.05 C485.1 3177.01,2040 3052.99,2164.02 ; 1907.33,2178.67 1940.47,2168.2 ; 1907.33,2178.67 1930,2178.67 1940.47,2168.2 ; C221.1 3027.01,2190 3052.99,2164.02
  Bottom Layer w10: v1(1527,2179) 1570,2222 1754.54,2222 1772.26,2239.71 1846.29,2239.71 v1(1883,2203) 2062,2203 2071,2212 v1(2237,2212) ; v1(1817,1654) 1520,1654 v1(1489,1685) 2002,1685 v1(2055,1738) ; v1(2314,2098) 2349.99,2062.01 v1(2737.01,2062.01)
Net*_23: *.23 C231.1 | length 1268.9
  Top Layer w10: C231.1 1322.36,2316.17 1356,2282.53 1356,1918 v1(1489,1785) ; *.23 2058.58,1808.42 v1(2075,1792)
  Bottom Layer w10: v1(1489,1785) 1496,1792 v1(2075,1792)
Net*_45: *.45 *.48 | length 691.8
  Top Layer w10: *.48 1861.73,2110 1820,2110 1754.54,2175.46 1754.54,2327.54 1780,2353 1833,2353 1846,2340 1846,2175.67 1860,2161.67 1902.33,2161.67 1920.79,2143.21 *.45
Net*_46: *.46 Osc.3O | length 3844.3
  Top Layer w10: v1(552,2244) 552,935 678,809 678,524 815,387 1080,387 1090,397 Osc.3O ; v1(1807,2316) 1829,2294 1829,2153.17 1837.5,2144.67 1889.14,2144.67 1901.1,2132.7 *.46
  Bottom Layer w10: v1(552,2244) 584,2276 1703.54,2276 1743.54,2316 v1(1807,2316)
Net*_47: *.47 Osc.1O | length 2305.4
  Top Layer w10: Osc.1O 922.28,1476.28 1184,1738 1184,1839 1260,1915 v1(1260,2032.59) ; v1(1792,2202) 1792,2162.04 1826.37,2127.67 1870,2127.67 1881.42,2116.25 *.47
  Bottom Layer w10: v1(1260,2032.59) 1290,2062.59 1548,2062.59 1627.41,2142 1732,2142 v1(1792,2202)
NetC11_2: C11.2 C12.1 L12.1 | length 1366.1
  Top Layer w10: C12.1 2220.2,1113 2244,1136.8 2244,1601 v1(2279,1636) ; v1(2685,1662) 2695.01,1662 2737.01,1620 ; L12.1 2701.89,1694.12 2737.01,1659 2737.01,1620 ; C11.2 2737.01,1620
  Bottom Layer w10: v1(2279,1636) 2659,1636 v1(2685,1662)
NetC12_2: C12.2 L13.1 L21.2 | length 542.9
  Top Layer w10: C12.2 2473,980 2478,985 L21.2 2656.22,1066 2645.2,1077.02 L13.1
NetC13_2: C13.2 L13.2 L14.1 | length 2076.7
  Top Layer w10: v1(2534,2250) 2534,1300 2545,1289 2726.01,1289 2737.01,1300 ; L13.2 2720,1247 2737.01,1264.01 2737.01,1300 ; C13.2 2737.01,1300 ; L14.1 3083.11,2371.89 v1(3118,2337)
  Bottom Layer w10: v1(2534,2250) 2551,2250 2638,2337 v1(3118,2337)
NetC14_2: "RF Switch.5P" C14.2 L14.2 | length 1422.5
  Top Layer w10: 2493.39,3542.6 2493.39,3504 2541,3504 2795,3250 2795,2892.99 C14.2 3047.99,2629 3080,2629 3099.63,2609.37 3146.89,2552.74 L14.2
NetC15_2: C15.2 C21.2 L21.1 | length 4396.6
  Top Layer w10: C21.2 v1(1310,2966) ; v1(2623,2700) 2717.01,2700 2737.01,2680 C15.2 2737.01,2564.01 2699,2526 2699,1922.53 2702,1919.53 2772,1919.53 2905.47,2053 3087,2053 3122,2018 3122,1494 3205,1411 3205,1389 3180,1364 3132,1364 3088,1320 3088,1009 3064,985 L21.1
  Bottom Layer w10: v1(1310,2966) 2357,2966 v1(2623,2700)
NetC32_2: C32.2 C33.2 L33.1 L41.2 | length 1653.4
  Top Layer w10: C33.2 702.99,1889.61 717.6,1875 C32.2 717.6,1729 686,1697.4 686,1399 720,1365 761,1365 836,1440 836,1542 786.89,1591.11 L41.2 972,1630 1164,1822 1164,1940 1199,1975 L33.1
NetC34_2: C34.2 L33.2 L34.1 | length 411
  Top Layer w10: L34.1 1222.6,1840 1297.4,1914.8 L33.2 C34.2
NetC35_2: C35.2 C36.1 L34.2 | length 868.6
  Top Layer w10: C36.1 1200.99,1025.01 1191,1035 1191,1331 1263,1403 1263,1484 1322.01,1543.01 C35.2 1322.01,1690 1297.4,1714.61 L34.2
NetC36_2: "RF Switch.8P" C36.2 | length 3621.5
  Top Layer w10: C36.2 1325,1160 1283,1202 1270,1202 1255,1217 1255,1283 1320,1283 1567,1530 1567,2368 1762,2563 1762,2885 1927,3050 v1@1927,3250 ; v1(1930,3637.5) 1937.5,3637.5 1945,3645 2345,3645 2416.61,3573.39 2416.61,3542.6
  Bottom Layer w10: v1(1926.81,3250) 1926.81,3378.19 1855,3450 1855,3480 1930,3555 v1(1930,3637.5)
NetC331_1: C331.1 C481.1 L331.2 | length 644.4
  Top Layer w10: L331.2 3085,888.99 3177.01,981 C481.1 3177.01,1201 3174.02,1203.99 C331.1
NetC483_1: "RF Switch.3P" C483.1 | length 618.9
  Top Layer w10: 2467.8,3367.4 2467.8,3295 2725,3037.8 C483.1
NetC483_2: C483.2 CONREVSMA001-SMD.1 | length 1166.4
  Top Layer w10: CONREVSMA001-SMD.1 v1(2040,3465) ; C483.2 v1(2600.98,2922.02)
  Bottom Layer w10: v1(2040,3465) 2400,3465 2600.98,3264.02 v1(2600.98,2922.02)
NetFL1_1: FL1.1 J1.1 P4.9 | length 3127.6
  Top Layer w10: FL1.1 1352,1250 v1(1547,1445)
  Bottom Layer w10: J1.1 v1(1547,1445) 1690,1445 1749,1386 1749,1032 1680,963 1625,920 P4.9
NetGreen_1: Green.1 R2.1 | length 609.9
  Top Layer w10: R2.1 3235.38,3122.31 3397.69,2960 Green.1
NetR1_1: R1.1 Red.1 | length 469.8
  Top Layer w10: Red.1 810,2892.69 877.31,2960 R1.1
RF_SWITCH: "RF Switch.2P" *.43 J1.16 | length 5514.7
  Top Layer w10: J1.16 195,1985 245,2035 v1(245,2403) v1(245,2543) ; v1(1920,2248) 1960.16,2207.84 *.43 ; v1(2200,3335) 2292,3427 2420,3427 2442.2,3404.8 2442.2,3367.4
  Bottom Layer w10: v1(245,2403) 2056,2403 2079,2380 2079,2300 2027,2248 v1(1920,2248) ; v1(245,2543) 744,3042 1892,3042 2200,3350 v1(2200,3335)
RX_TX: *.5 C31.1 L32.2 | length 1681.4
  Top Layer w10: C31.1 707.99,2267.12 728.11,2247 L32.2 756,2165 756,1884 v1(794,1846) ; v1(1678,2019) 1700,1997 1829,1997 1829,1999.53 *.5
  Bottom Layer w10: v1(794,1846) 820,1872 1290,1872 1362,1944 1564,1944 1625,2005 1664,2005 v1(1678,2019)
WMCU_RESET: *.35 C351.1 J2.10 J2.11 P4.6 R351.1 | length 7099.6
  Top Layer w10: *.35 2116.58,2058.58 2140.68,2082.68 2194.68,2082.68 2220,2108 2220,2142 2176,2186 2176,2232 2329,2385 v1(2531,2385) ; v1(2340,2649) C351.1 ; J2.11 3295,1705 3295,2052 3177.01,2169.99 R351.1 3303,2215 3383,2295 3605,2295 J2.10
  Bottom Layer w10: P4.6 1925,241.56 3128.44,1445 J2.11 ; v1(2340,2649) 3351,2649 3569,2431 ; v1(2531,2385) 2577,2431 3569,2431 ; J2.10 3569,2431
WMCU_RXD: *.18 J1.5 P4.8 | length 4624.5
  Top Layer w10: J1.5 373,1767 373,804.22 1104.28,72.94 1662.94,72.94 P4.8 2038,448 2038,1625.2 2027.46,1635.74 2014.26,1635.74 1962.64,1687.36 1962.64,1806.36 1960.16,1808.84 *.18
WMCU_SWO: *.28 J2.9 P4.1 | length 4726.9
  Top Layer w10: *.28 2169.21,1920.79 2206.53,1883.47 2350.64,1883.47 2428,1960.83 2428,2204 2546,2322 v1(2561,2322)
  Bottom Layer w10: P4.1 2462.06,135 3731,1403.94 3731,2181 3700,2212 3688,2212 J2.9 3597,2303 3597,2370 3580,2387 2626,2387 v1(2561,2322)
WMCU_TCK: *.25 J2.15 P4.4 | length 3269.4
  Top Layer w10: *.25 2118.01,1861.73 2165.74,1814 ; P4.4 2125,1315 2210,1400 2210,1666.41 2229.54,1685.95 2229.54,1782.93 2200,1812.47 2167.27,1812.47 2165.74,1814 ; v1(2240.83,1792.58) 2219.42,1814 2165.74,1814
  Bottom Layer w10: v1(2240.83,1792.58) 2259.25,1811 3521,1811 J2.15
WMCU_TMS: *.24 J2.13 P4.5 | length 3425.6
  Top Layer w10: P4.5 2092,202 v1@2094.71,1416.99 ; *.24 2093.74,1829 2127.27,1795.47 2165.53,1795.47 2200,1776.95 2212.54,1764.41 2212.54,1715.5 2193,1695.95 2193,1646 2095,1548 v1@2094.71,1417 ; v1(2092,1417) v1@2094.71,1417
  Bottom Layer w10: v1(2092,1417) 2982,1417 3210,1645 J2.13
WMCU_TXD: *.19 J1.7 P4.7 | length 4774.3
  Top Layer w10: v1(253,1187) 253,2003 J1.7 ; P4.7 2055,365 2055,1649.67 2048.19,1656.48 2022.33,1656.48 1979.84,1698.96 *.19
  Bottom Layer w10: v1(253,1187) 1363.53,76.47 1766.47,76.47 P4.7
pads on no net: J1.18 J1.20 J2.8 J2.20

## Polygon pours and split planes (outlines as drawn)
no net on Top Layer "Top Layer-No Net" (solid, pour order 0): 2705,3415

## Keep-outs
Keep-Out Layer:
  lines w10: 1865,1865 2075,1865 2075,2075 1865,2075 1865,1865

## Silkscreen, mask and mechanical layers (free items; w line width, h text height)
Bottom Overlay:
  text "The Agriculture Boys" at 3015,1990 h210
  text "Gabriel Anhalzer, Heinz Boehmer, Dhruva Koley" at 3260,960 h60
  text "Bennett Miller, Ruben Vargas" at 2710,805 h60

## Text inside footprints (layer, text, board x,y; h text height)
J1: Top Overlay "20" at 215,2405 h50 r90; Top Overlay "10" at 315,2405 h50 r90; Top Overlay "1" at 215,1365 h50 r90; Top Overlay "1" at 215,1325 h50 r90; Top Overlay "1" at 335,1365 h50 r90
J2: Top Overlay "20" at 3575,2405 h50 r90; Top Overlay "10" at 3675,2405 h50 r90; Top Overlay "1" at 3575,1365 h50 r90; Top Overlay "1" at 3575,1325 h50 r90; Top Overlay "1" at 3695,1365 h50 r90